# Altium PCB PCB_OLED_1.3.PcbDoc
Units mm, origin at the board's own origin, x right, y up, seen from the top; angles counter-clockwise.
Board outline 35.05 x 27.18 mm, 2 copper layers (Top Layer, Bottom Layer); 19 components, 14 nets, 67 pads, 49 vias.
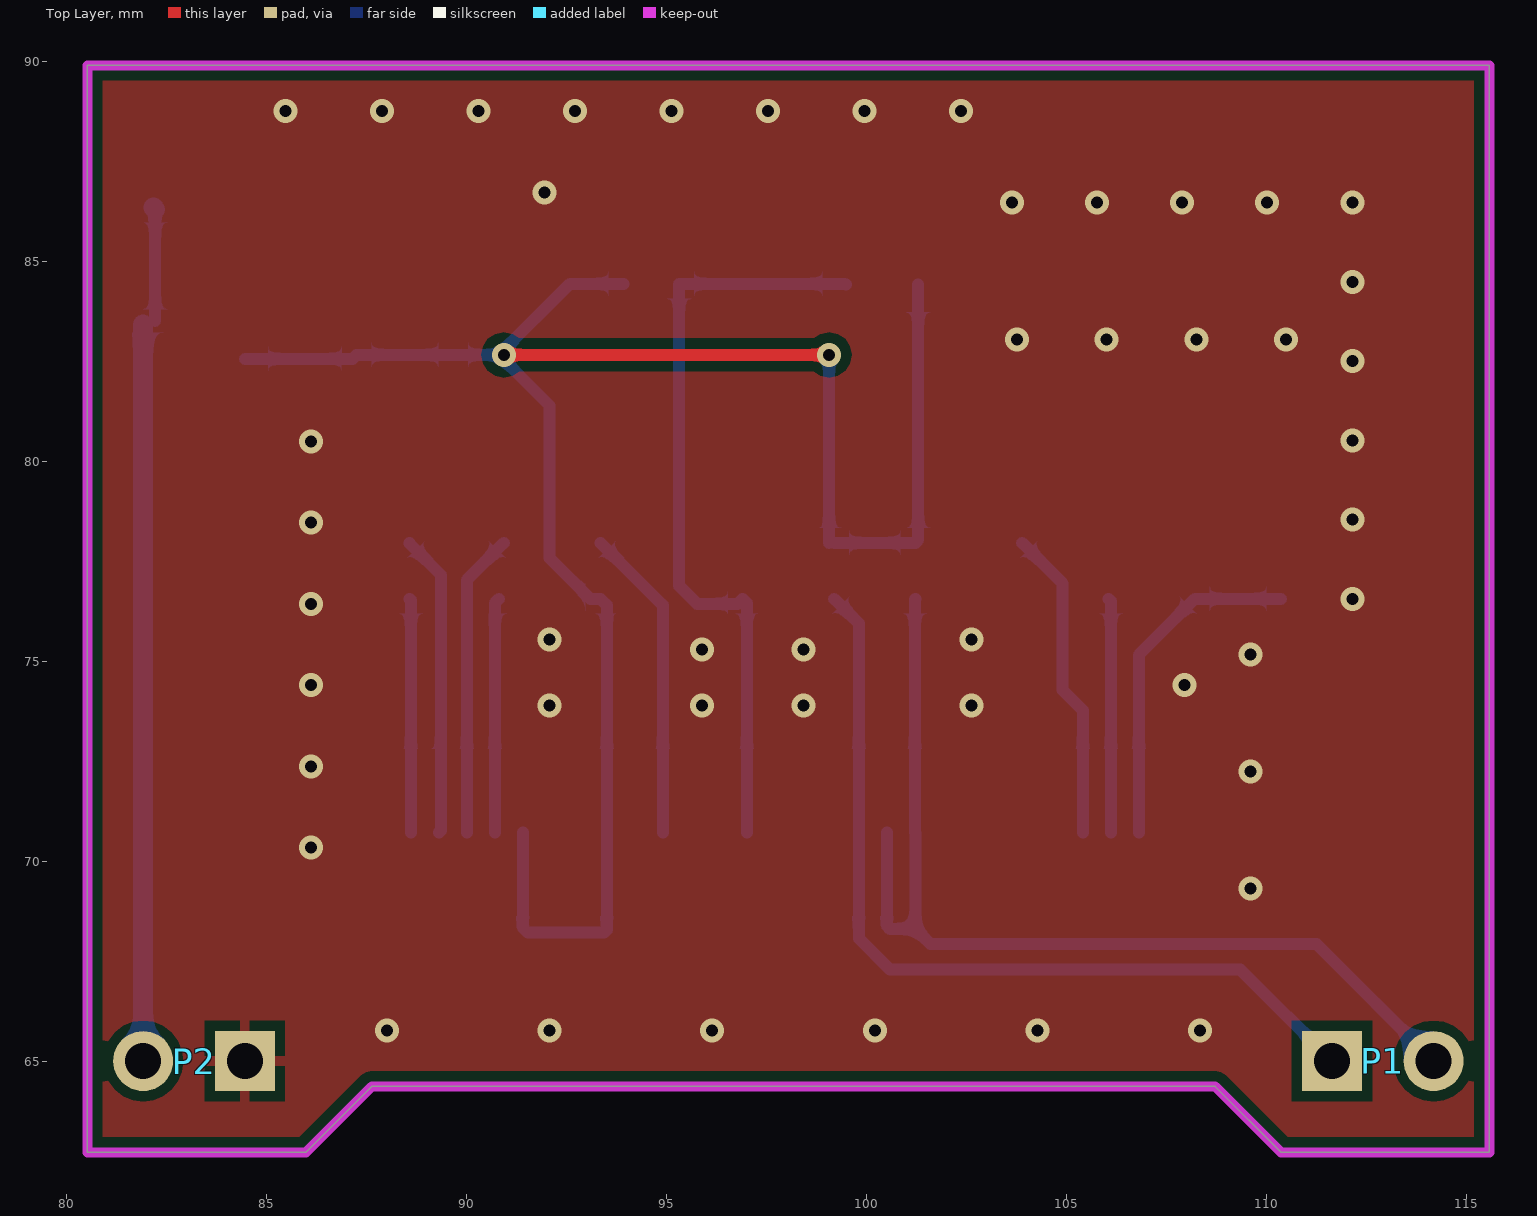
[diagram p0: Top Layer view]
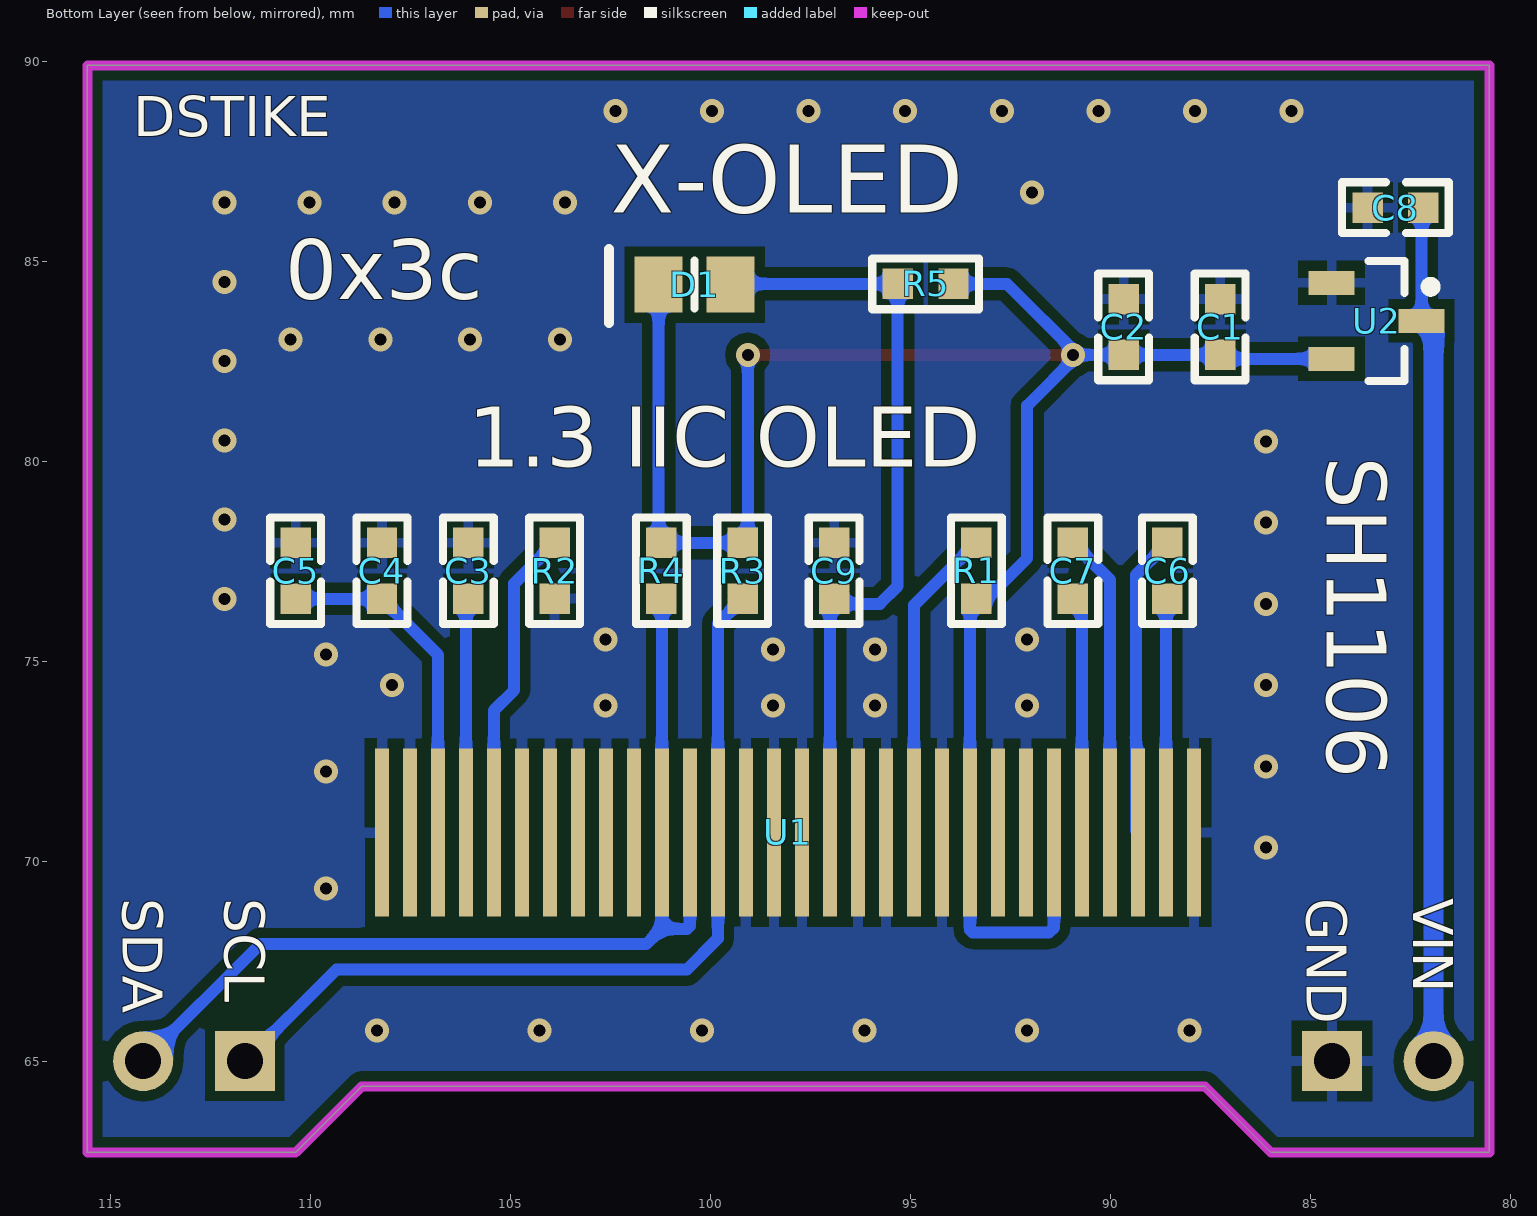
[diagram p1: Bottom Layer view, seen from below]

## Layer stack, top to bottom
Top Solder: solder mask 0.0102, Solder Resist, Dk 3.5
Top Layer: signal copper 0.0356
Dielectric 1: dielectric 0.32, FR-4, Dk 4.8
Bottom Layer: signal copper 0.0356
Bottom Solder: solder mask 0.0102, Solder Resist, Dk 3.5

## Board outline
80.518,62.738 80.518,89.916 115.57,89.916 115.57,62.738 110.363,62.738 108.712,64.389 87.63,64.389 85.979,62.738

## Design rules (kind name [scope] priority, off if disabled: settings)
Clearance [All] p1: gap=0.254
PolygonConnect [All] p1: connectstyle=Relief reliefconductorwidth=0.254 reliefentries=4 polygonreliefangle="90 Angle" airgapwidth=0.254
RoutingVias [All] p1: holewidth=0.711 width=1.27 viastyle="Through Hole" minholewidth=0.711 minwidth=1.27 maxholewidth=0.711 maxwidth=5
SolderMaskExpansion [All] p1: expansion=0.102
Width [All] p1: maxlimit=6 minlimit=0.254 preferedwidth=0.254
30 further rules are at their usual default settings.

## Components (designator, comment, footprint, x,y, rotation, side; value= is the part's Value field where it differs from the comment)
C1 "1uF" C0603 87.071,82.652 r90 bottom
C2 "2.2uF" C0603 89.484,82.652 r90 bottom
C3 "2.2uF" C0603 105.867,76.556 r90 bottom
C4 "2.2uF" C0603 108.026,76.556 r90 bottom
C5 "1uF" C0603 110.185,76.556 r90 bottom
C6 "1uF" C0603 88.392,76.556 r90 bottom
C7 "1uF" C0603 91.11,78.003 r270 bottom
C8 "C0603" C0603 82.144,86.538 r0 bottom
C9 "4.7uF" C0603 96.723,76.556 r90 bottom
D1 "1N4148" 1N4148 99.568,84.455 r0 bottom
P1 "Header 2" HDR1X2 111.633,65.024 r0 top
P2 "Header 2" HDR1X2 84.455,65.024 r180 top
R1 "4.7K" R0603 93.345,77.28 r90 bottom
R2 "560K" R0603 103.886,77.28 r90 bottom
R3 "4.7K" R0603 99.187,77.28 r270 bottom
R4 "4.7K" R0603 101.219,77.28 r270 bottom
R5 "4.7K" R0603 94.615,84.455 r0 bottom
U1 "SSH1106" SSH1106 80.741,66.802 r0 top
U2 "Power" 662K 83.312,83.566 r180 bottom

## Footprints (in the part's own frame and the unit in brackets; to place one, negate y for a bottom-side part, rotate by r counter-clockwise, add the part's x,y. Pads: shape width x height; smd on the part's side, far side on the other; paste and mask are expansions set on the pad)
1N4148 [mm]
  rect 1.2x1.4 smd: 1(-0.082,0.022) 2(1.718,0.022)
  silkscreen extent 0.82,-0.87 2.96,0.98, body extent -0.26,-0.68 1.89,0.72, height 0.7
662K [mm]
  rect 1.15x0.6 smd: 1(-1.151,0.914) 2(-1.151,-0.986) 3(1.099,-0.036)
  silkscreen extent -0.23,-1.54 1.45,1.46, body extent -0.73,-1.54 0.67,1.46, height 1.1
C0603 [mil]
  rect 30x30 smd: 1(1,7) 2(56,7)
  silkscreen extent -24,-18 81,32
HDR1X2 [mm] "Connector; Header; 2 Position"
  rect 1.5x1.5 hole 0.9: 1(0,0)
  round 1.5 hole 0.9: 2(2.54,0)
R0603 [mil]
  rect 30x30 smd: 1(-27.5,0) 2(27.5,0)
  silkscreen extent -52,-25 52,25
SSH1106 [mm]
  rect 0.35x4.2 smd far side: 1(7.163,3.937) 2(7.863,3.937) 3(8.563,3.937) 4(9.263,3.937) 5(9.963,3.937) 6(10.663,3.937) 7(11.363,3.937) 8(12.063,3.937) 9(12.763,3.937) 10(13.463,3.937) 11(14.163,3.937) 12(14.863,3.937) 13(15.563,3.937) 14(16.263,3.937) 15(16.963,3.937) 16(17.663,3.937) 17(18.363,3.937) 18(19.063,3.937) 19(19.763,3.937) 20(20.463,3.937) 21(21.163,3.937) 22(21.863,3.937) 23(22.563,3.937) 24(23.263,3.937) 25(23.963,3.937) 26(24.663,3.937) 27(25.363,3.937) 28(26.063,3.937) 29(26.763,3.937) 30(27.463,3.937)

## Part data
C1 C2 C3 C4 C5 C6 C7 C9: library part C0603, "贴片电容"
C8: "贴片电容"
D1: "二极管"
P1 P2: "Header, 2-Pin"
R1 R2 R3 R4 R5: library part R0603, "贴片电阻"
U1: "1.3寸OLED"
U2: library part 662K, "稳压芯片"

## Via types
v1: diameter 0.6, hole 0.3, Top Layer to Bottom Layer, tented both sides, 49 vias

## Nets (pads, with @x,y where several pads share a name; then routed paths per layer and width w, separated by ;. In a path a pad name is that pad's centre, name@x,y a point inside that pad or via, vN(x,y) a via of type N, cw(c..) or ccw(c..) an arc to the next point about the centre after c; other vN are vias at no path point)
GND: C1.2 C2.2 C3.2 C4.2 C5.2 C8.2 C9.2 P2.1 R2.1 U1.1 U1.7 U1.8 U1.10 U1.12 U1.13 U1.15 U1.16 U1.17 U1.21 U1.22 U1.23 U1.24 U1.25 U1.29 U1.30 U2.1
  other v1: 88.011,65.786 92.075,65.786 96.139,65.786 100.203,65.786 104.267,65.786 108.331,65.786 109.601,69.342 86.106,70.358 109.601,72.263 86.106,72.39 92.075,73.914 95.885,73.914 98.425,73.914 102.616,73.914 86.106,74.422 107.95,74.422 109.601,75.184 95.885,75.311 98.425,75.311 92.075,75.565 102.616,75.565 86.106,76.454 112.141,76.581 86.106,78.486 112.141,78.562 86.106,80.518 112.141,80.543 112.141,82.525 103.759,83.058 106.003,83.058 108.246,83.058 110.49,83.058 112.141,84.506 103.632,86.487 105.759,86.487 107.886,86.487 110.014,86.487 112.141,86.487 91.948,86.741 85.471,88.773 87.884,88.773 90.297,88.773 92.71,88.773 95.123,88.773 97.536,88.773 99.949,88.773 102.362,88.773
NetC3_1: C3.1 U1.27 | length 5.9
  Bottom Layer w0.3: C3.1 106.104,76.522 U1.27
NetC4_1: C4.1 C5.1 U1.28 | length 8.6
  Bottom Layer w0.3: U1.28 106.804,75.181 C4.1 C5.1
NetC6_1: C6.1 U1.2 | length 5.9
  Bottom Layer w0.3: C6.1 88.604,76.547 U1.2
NetC6_2: C6.2 U1.3 | length 7.6
  Bottom Layer w0.3: C6.2 88.57,77.965 89.355,77.18 89.355,70.79 U1.3
NetC7_1: C7.1 U1.4 | length 7.6
  Bottom Layer w0.3: U1.4 90.004,77.05 C7.1
NetC7_2: C7.2 U1.5 | length 5.9
  Bottom Layer w0.3: U1.5 90.704,76.48 C7.2@90.805,76.581
NetC9_1: C9.1 D1.1 R5.2 U1.14 | length 19.4
  Bottom Layer w0.3: U1.14 97.004,76.478 C9.1 96.774,76.454 95.758,76.454 95.313,76.898 R5.2 99.464,84.455 D1.1
NetR1_2: R1.2 U1.11 | length 7.9
  Bottom Layer w0.3: R1.2 94.904,76.419 U1.11
NetR2_2: R2.2 U1.26 | length 7.9
  Bottom Layer w0.3: R2.2 104.902,76.962 104.902,74.295 105.404,73.793 U1.26
SCL: P1.1 R3.2 U1.18 | length 21.8
  Bottom Layer w0.3: R3.2 99.804,75.964 U1.18 99.804,68.09 100.584,67.31 109.347,67.31 P1.1
SDA: P1.2 R4.2 U1.19 U1.20 | length 25.7
  Bottom Layer w0.3: U1.19 100.504,68.406 100.584,68.326 101.219,68.326 ; R4.2 101.204,76.566 U1.20 101.219,70.724 101.219,68.326 ; P1.2 111.252,67.945 101.6,67.945 101.219,68.326
VCC: C8.1 P2.2 U2.3 | length 21.3
  Bottom Layer w0.3: U2.3 C8.1@82.213,86.316
  Bottom Layer w0.5: P2.2 U2.3@81.915,83.439 ; C8.1 C8.1@82.213,86.316
VCC_3V3: C1.1 C2.1 D1.2 R1.1 R3.1 R4.1 R5.1 U1.6 U1.9 U2.2 | length 51.9
  Top Layer w0.3: v1(90.932,82.677) v1(99.06,82.677)
  Bottom Layer w0.3: U2.2 87.152,82.58 C1.1 C2.1 v1@90.805,82.677 ; v1(90.932,82.677) v1@90.805,82.677 ; U1.6 91.404,68.362 91.531,68.235 93.436,68.235 93.504,68.303 U1.9 93.504,76.422 R1.1 93.091,76.581 92.075,77.597 92.075,81.407 v1@90.805,82.677 ; R5.1 92.583,84.455 v1@90.805,82.677 ; R3.1@99.06,77.978 v1(99.06,82.677) ; R3.1 R4.1 101.286,78.045 D1.2

## Polygon pours and split planes (outlines as drawn)
GND on Top Layer "Bottom Layer-No Net" (solid, remove dead copper, pour order 10): 79.629,90.424 116.586,90.424 116.586,61.976 116.84,61.722 79.121,61.722
GND on Bottom Layer "Bottom Layer-No Net" (solid, remove dead copper, pour order 12): 79.375,90.932 116.459,90.932 116.586,91.059 116.967,90.678 116.967,61.595 79.756,61.595 79.121,60.96

## Keep-outs
Keep-Out Layer:
  the board outline again, w0.254

## Silkscreen, mask and mechanical layers (free items; w line width, h text height)
Bottom Overlay:
  text "DSTIKE" at 114.427,88.138 h1
  text "X-OLED" at 102.489,86.233 h1.7
  text "0x3c" at 110.617,84.074 h1.5
  text "SH1106" at 84.582,80.137 h1.5 r90
  text "1.3 IIC OLED" at 106.045,79.883 h1.5
  text "VIN" at 82.423,69.088 h1 r90
  text "GND" at 85.09,69.088 h1 r90
  text "SCL" at 112.141,69.088 h1 r90
  text "SDA" at 114.681,69.088 h1 r90